# Altium PCB 330 下灯位.PcbDoc (part 1 of 5)
Units mm, origin at the board's own origin, x right, y up, seen from the top; angles counter-clockwise.
Board outline 301.8 x 92.3 mm, 2 copper layers (Top, Bottom), stack 0.323 mm thick; 298 components, 203 nets, 2190 pads, 758 vias.
Unrouted connection lines stored in the file: 36.
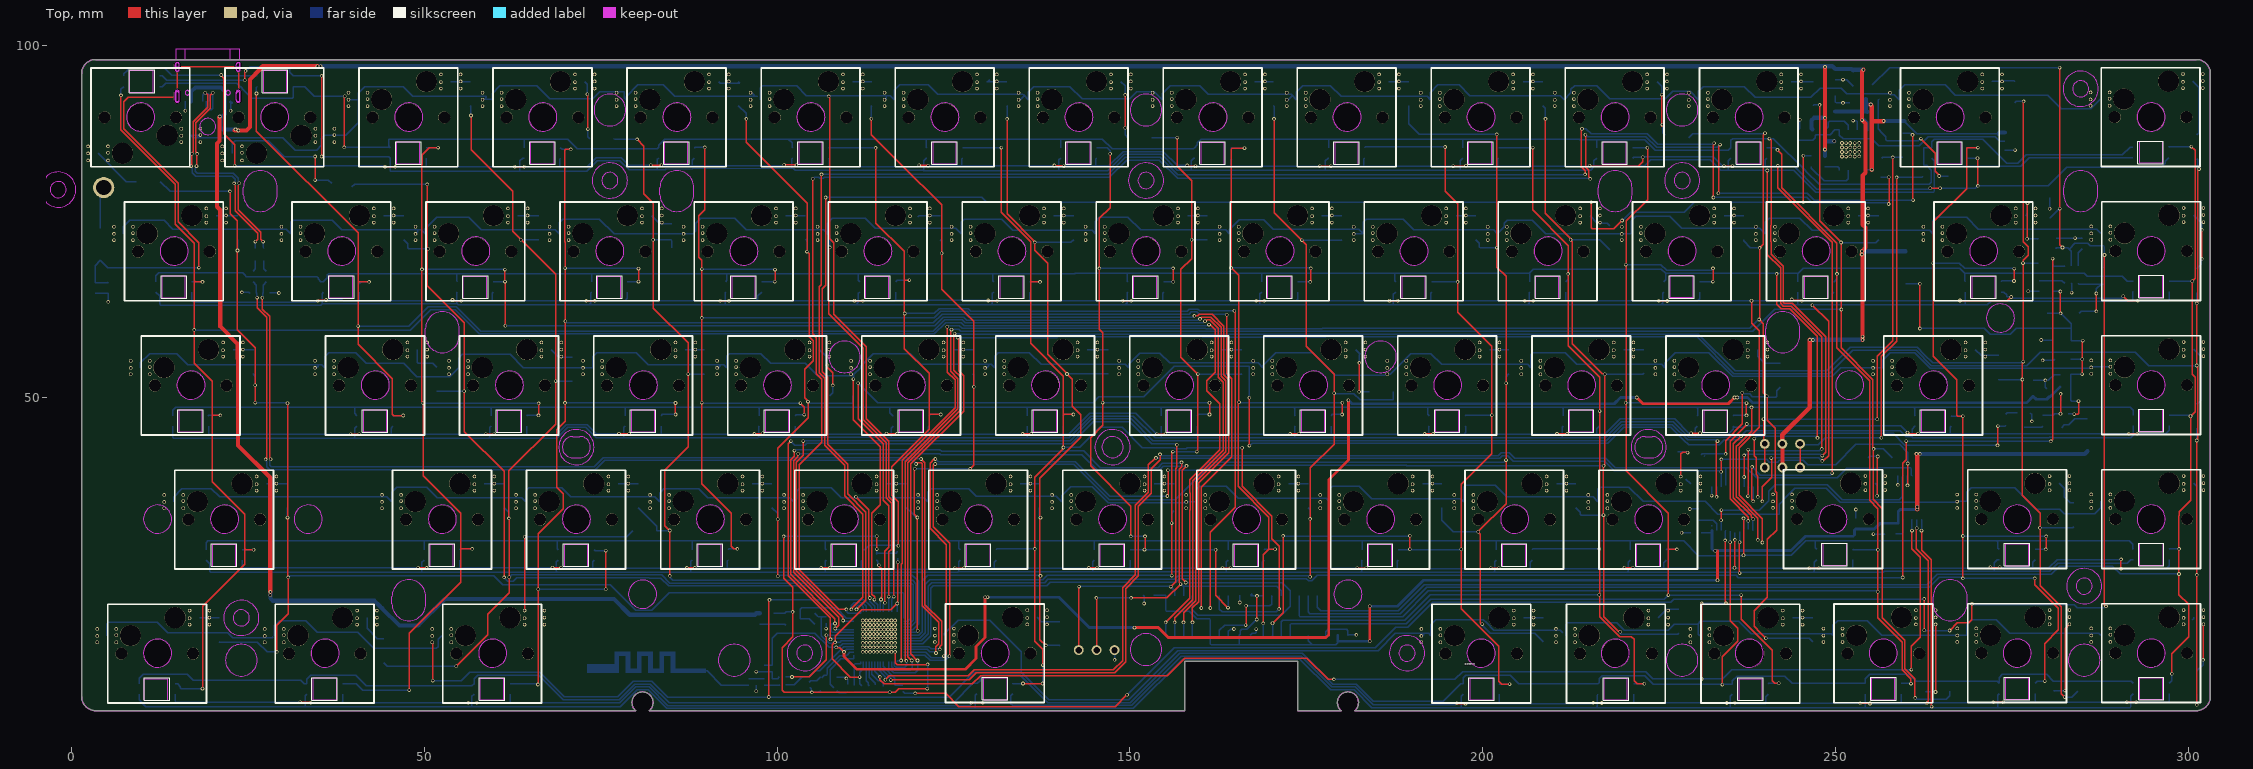
[diagram p0: Top view]
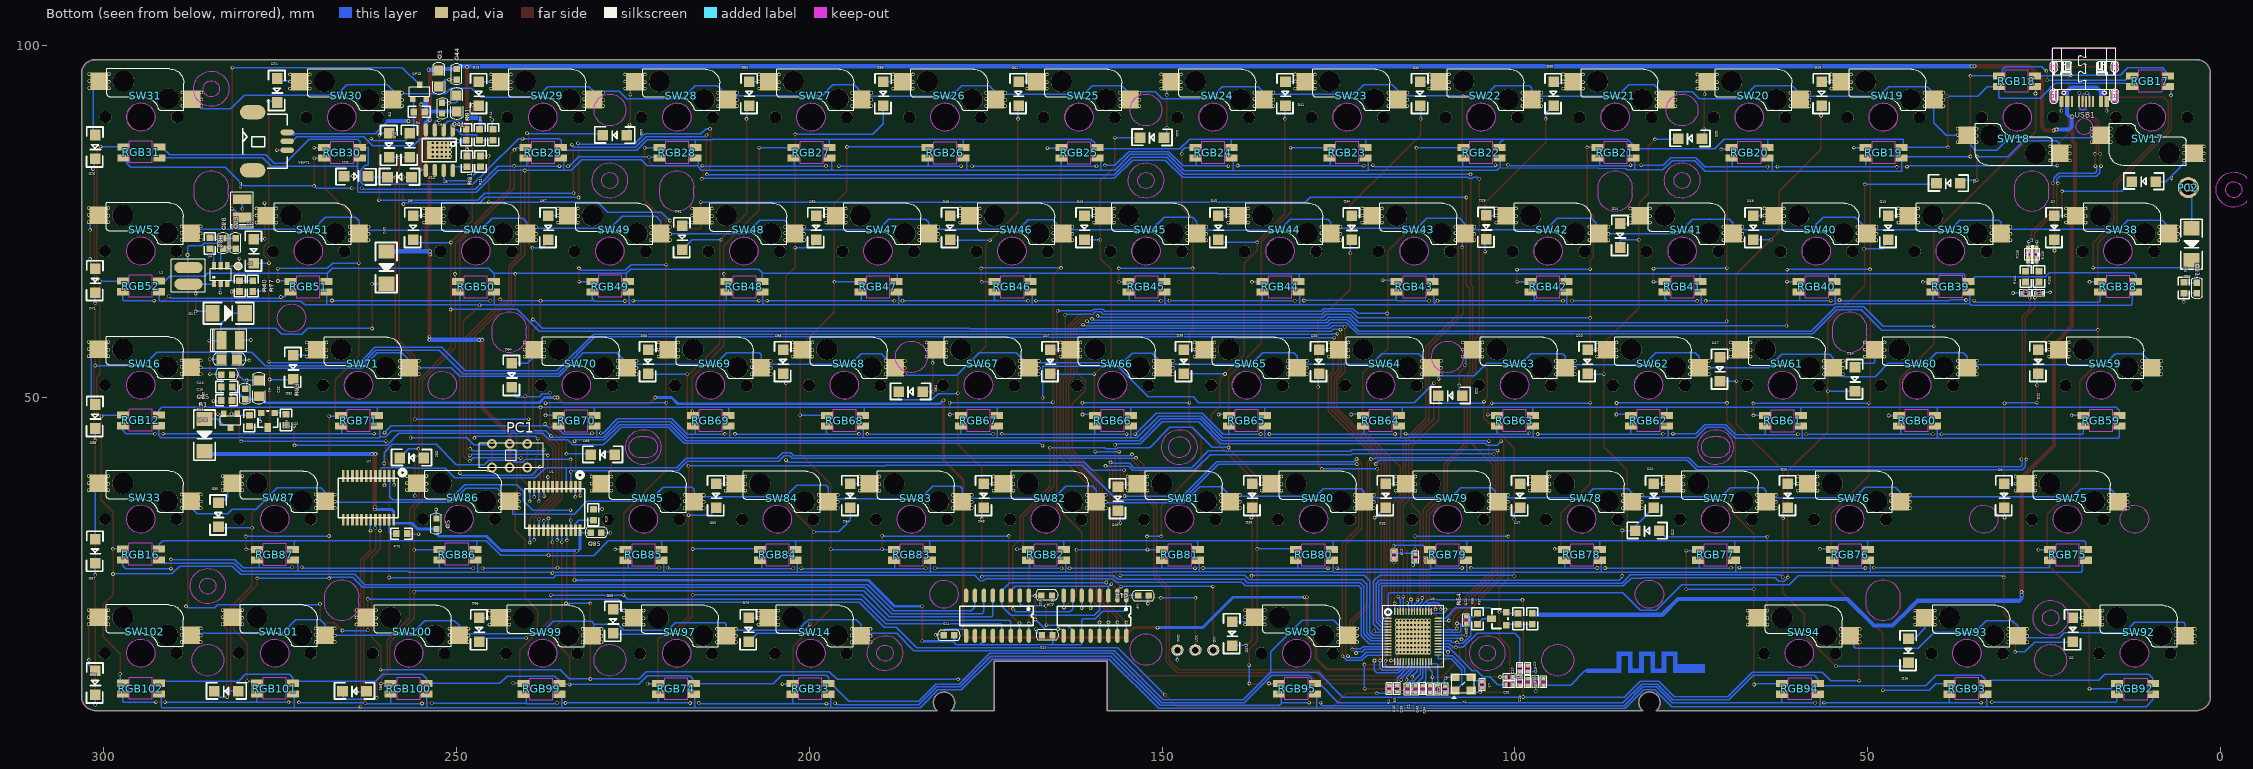
[diagram p1: Bottom view, seen from below]

## Layer stack, top to bottom
Solder Mask Top: solder mask 0.0102, Solder Resist, Dk 3.5
Top: signal copper 0.0343
Dielectric 1: dielectric 0.254, FR-4, Dk 4.3
Bottom: signal copper 0.0343
Solder Mask Bottom: solder mask 0.0102, Solder Resist, Dk 3.5

## Board outline
3.386,5.645 cw(c3.386,7.645) 1.386,7.645 1.386,95.945 cw(c3.386,95.945) 3.386,97.945 301.186,97.945 cw(c301.186,95.945) 303.186,95.945 303.186,7.645 cw(c301.186,7.645) 301.186,5.645 181.879,5.645 ccw(c180.916,6.795) 179.953,5.645 173.786,5.645 173.786,12.645 157.786,12.645 157.786,5.645 81.879,5.645 ccw(c80.916,6.795) 79.953,5.645

## Design rules (kind name [scope] priority, off if disabled: settings)
Clearance "Clearance - Default - DEFAULT - Net" [All] p1: gap=0.2 ignorepadtopadclearanceinfootprint=TRUE
ComponentClearance "ComponentClearance - Default - DEFAULT" [All] p1: gap=0.152 collisioncheckmode=3 verticalgap=0.254 showdistances=FALSE
DiffPairsRouting "DiffPairsRouting - DiffPair - Default" [All] p1: maxlimit=0.2 minlimit=0.2 mostfreqgap=0.2 toplayer_minwidth=0.2 toplayer_maxwidth=0.2 toplayer_prefwidth=0.2 bottomlayer_minwidth=0.2 bottomlayer_maxwidth=0.2 bottomlayer_prefwidth=0.2 maxuncoupledlength=12.7
FanoutControl Fanout_SOIC [IsSOIC] p1: bgadir=Out bgaviamode=Centered fanoutstyle=Auto fanoutdirection=Alternating viagrid=0.025 // Fanout_SOIC (Default Rule)
FanoutControl Fanout_Small [(CompPinCount < 5)] p2: bgadir=Out bgaviamode=Centered fanoutstyle=Auto fanoutdirection=OutThenIn viagrid=0.025 // Fanout_Small (Default Rule)
FanoutControl Fanout_BGA [IsBGA] p3: bgadir=Out bgaviamode=Centered fanoutstyle=Auto fanoutdirection=Alternating viagrid=0.025 // Fanout_BGA (Default Rule)
FanoutControl Fanout_LCC [IsLCC] p4: bgadir=Out bgaviamode=Centered fanoutstyle=Auto fanoutdirection=Alternating viagrid=0.025 // Fanout_LCC (Default Rule)
HoleToHoleClearance "HoleToHoleClearance - Default - DEFAULT" [All] p1: gap=0.152 allowstackedmicrovias=TRUE
Length "Default Length" [All] p1: maxlimit=1270 minlimit=0
MaxMinImpedance "Default Impedance" [All] p1: minimum=50.00 maximum=150.0
ParallelSegment "Default Parallel Segment Same Layer" [All] p1: limit=25.4 gap=5.08
ParallelSegment "Default Parallel Segment Adjasent" [All] p2: limit=25.4 gap=5.08
PolygonConnect [All] p1: connectstyle=Direct reliefconductorwidth=0.254 reliefentries=4 polygonreliefangle="90 Angle" airgapwidth=0.254
RoutingLayers "RoutingLayers - Default - DEFAULT" [All] p1: top layer_v5=TRUE bottom layer_v5=TRUE
RoutingPriority "RoutingPriority - Default - DEFAULT" [All] p1: routingpriority=3
RoutingTopology "Default Routing Topology" [All] p1: topology=Shortest
RoutingVias "RoutingVias - Default - DEFAULT" [All] p1: holewidth=0.305 width=0.508 viastyle="Through Hole" minholewidth=0.305 minwidth=0.508 maxholewidth=0.305 maxwidth=0.508
SMDToCorner "SMDToCorner - Default - DEFAULT" [All] p1: distance=0
SolderMaskExpansion [All] p1: expansion=0.102 istentingtop=FALSE
Width "Default Width" [All] p1: maxlimit=2 minlimit=0.15 preferedwidth=0.3
20 further rules are at their usual default settings.

## Classes and differential pairs
differential pair NewDifferentialPair1: +$$$12993 -$$$8367
differential pair $$$1963: +$$$19631 -$$$19635
differential pair USB_D: +USB_DN -USB_DP

## Components (designator, comment, footprint, x,y, rotation, side; value= is the part's Value field where it differs from the comment)
C1 "0402C" 0402C 109.903,8.677 r270 bottom
C2 "SC0402" SC0402 113.054,8.711 r90 bottom
C3 "0805CA" 0805CA 252.549,96.386 r270 bottom
C4 "0603C" 0603C 279.98,50.539 r270 bottom
C5 "0603C" 0603C 252.857,32.131 r270 bottom
C6 "0603C" 0603C 252.081,91.044 r90 bottom
C7 "0402C" 0402C 104.614,9.329 r90 bottom
C11 "0603C" 0603C 180.213,16.32 r180 bottom
C13 "SC0402" SC0402 99.304,11.611 r90 bottom
C14 "0603C" 0603C 152.654,21.971 r180 bottom
C15 "0805CA" 0805CA 283.364,55.447 r180 bottom
C16 "0603C" 0603C 166.37,21.971 r0 bottom
C17 "0603C" 0603C 166.28,16.32 r0 bottom
C18 "0402C" 0402C 95.947,9.702 r90 bottom
C19 "SC0402" SC0402 117.094,27.686 r270 bottom
C20 "0402C" 0402C 99.303,9.723 r270 bottom
C21 "0603C" 0603C 3.321,65.555 r90 bottom
C23 "0603C" 0603C 281.305,71.882 r270 bottom
C25 "0603C" 0603C 282.607,53.278 r0 bottom
C26 "0402C" 0402C 98.166,9.711 r270 bottom
C27 "0402C" 0402C 97.061,9.705 r90 bottom
C28 "0603C" 0603C 283.083,71.882 r270 bottom
C31 "0402C" 0402C 100.782,9.329 r0 bottom
C32 "0805CA" 0805CA 278.048,50.218 r90 bottom
C33 "SC0402" SC0402 114.081,8.705 r90 bottom
C34 "SC0402" SC0402 110.99,8.705 r90 bottom
C35 "0603C" 0603C 230.239,30.861 r0 bottom
C36 "SC0402" SC0402 100.78,10.414 r0 bottom
C37 "SC0402" SC0402 114.081,27.389 r270 bottom
C38 "SC0402" SC0402 106.934,18.484 r90 bottom
C40 "SC0402" SC0402 115.206,8.708 r90 bottom
C41 "0805CA" 0805CA 249.989,90.589 r90 bottom
C43 "SC0402" SC0402 112.019,8.705 r90 bottom
C44 "0603C" 0603C 249.986,95.84 r270 bottom
CA2 "CAP-TAN-B-3528" CAP-TAN-B-3528 280.416,76.835 r90 bottom
CA3 "CAP-TAN-B-3528" CAP-TAN-B-3528 282.063,58.14 r180 bottom
D1 "IN1418SMD" IN1418SMD 36.73,80.391 r0 bottom
D2 "IN1418SMD" IN1418SMD 20.884,18.915 r270 bottom
D3 "IN1418SMD" IN1418SMD 30.621,37.915 r270 bottom
D5 "IN1418SMD" IN1418SMD 9.044,80.645 r0 bottom
D6 "IN1418SMD" IN1418SMD 256.171,75.914 r270 bottom
D7 "IN1418SMD" IN1418SMD 23.504,75.91 r270 bottom
D9 "IN1418SMD" IN1418SMD 259.588,87.574 r270 bottom
D10 "IN1418SMD" IN1418SMD 256.313,81.28 r0 bottom
D11 "IN1418SMD" IN1418SMD 266.079,81.396 r180 bottom
D12 "IN1418SMD" IN1418SMD 25.793,56.915 r270 bottom
D13 "IN1418SMD" IN1418SMD 47.061,75.917 r270 bottom
D14 "IN1418SMD" IN1418SMD 51.778,54.4 r270 bottom
D15 "IN1418SMD" IN1418SMD 61.292,37.916 r270 bottom
D16 "IN1418SMD" IN1418SMD 44.196,15.946 r270 bottom
D17 "IN1418SMD" IN1418SMD 70.918,55.865 r270 bottom
D18 "IN1418SMD" IN1418SMD 66.182,75.916 r270 bottom
D19 "IN1418SMD" IN1418SMD 56.493,94.914 r270 bottom
D21 "IN1418SMD" IN1418SMD 80.287,37.913 r270 bottom
D22 "IN1418SMD" IN1418SMD 79.431,31.115 r0 bottom
D23 "IN1418SMD" IN1418SMD 89.692,56.917 r270 bottom
D24 "IN1418SMD" IN1418SMD 85.068,74.796 r270 bottom
D25 "IN1418SMD" IN1418SMD 73.363,86.725 r0 bottom
D27 "IN1418SMD" IN1418SMD 99.256,37.912 r270 bottom
D28 "IN1418SMD" IN1418SMD 107.342,50.292 r0 bottom
D29 "IN1418SMD" IN1418SMD 104.031,75.965 r270 bottom
D30 "IN1418SMD" IN1418SMD 94.513,94.914 r270 bottom
D32 "IN1418SMD" IN1418SMD 118.299,37.918 r270 bottom
D33 "IN1418SMD" IN1418SMD 127.755,56.917 r270 bottom
D34 "IN1418SMD" IN1418SMD 123.118,75.896 r270 bottom
D35 "IN1418SMD" IN1418SMD 113.434,94.917 r270 bottom
D37 "IN1418SMD" IN1418SMD 140.081,18.359 r270 bottom
D38 "IN1418SMD" IN1418SMD 137.219,37.916 r270 bottom
D39 "IN1418SMD" IN1418SMD 146.916,56.912 r270 bottom
D40 "IN1418SMD" IN1418SMD 142.017,75.917 r270 bottom
D41 "IN1418SMD" IN1418SMD 132.514,94.912 r270 bottom
D43 "IN1418SMD" IN1418SMD 160.999,75.914 r270 bottom
D44 "IN1418SMD" IN1418SMD 149.633,86.868 r0 bottom
D46 "IN1418SMD" IN1418SMD 156.254,37.501 r270 bottom
D47 "IN1418SMD" IN1418SMD 165.836,56.915 r270 bottom
D48 "IN1418SMD" IN1418SMD 180.057,75.916 r270 bottom
D49 "IN1418SMD" IN1418SMD 175.272,37.915 r270 bottom
D50 "IN1418SMD" IN1418SMD 183.858,50.841 r0 bottom
D51 "IN1418SMD" IN1418SMD 170.353,94.916 r270 bottom
D53 "IN1418SMD" IN1418SMD 199.033,75.913 r270 bottom
D54 "IN1418SMD" IN1418SMD 194.206,37.915 r270 bottom
D55 "IN1418SMD" IN1418SMD 203.734,56.917 r270 bottom
D56 "IN1418SMD" IN1418SMD 189.51,94.915 r270 bottom
D58 "IN1418SMD" IN1418SMD 222.869,56.91 r270 bottom
D59 "IN1418SMD" IN1418SMD 227.819,20.112 r270 bottom
D60 "IN1418SMD" IN1418SMD 213.231,37.91 r270 bottom
D61 "IN1418SMD" IN1418SMD 218.027,74.501 r270 bottom
D62 "IN1418SMD" IN1418SMD 208.511,94.916 r270 bottom
D64 "IN1418SMD" IN1418SMD 242.194,54.965 r270 bottom
D65 "IN1418SMD" IN1418SMD 246.815,18.913 r270 bottom
D66 "IN1418SMD" IN1418SMD 227.513,41.91 r0 bottom
D67 "IN1418SMD" IN1418SMD 237.002,75.915 r270 bottom
D68 "IN1418SMD" IN1418SMD 225.789,87.195 r0 bottom
D70 "IN1418SMD" IN1418SMD 278.765,72.588 r270 bottom
D71 "IN1418SMD" IN1418SMD 301.244,68.397 r270 bottom
D72 "IN1418SMD" IN1418SMD 256.667,87.603 r270 bottom
D73 "IN1418SMD" IN1418SMD 246.85,94.915 r270 bottom
D74 "IN1418SMD" IN1418SMD 275.463,95.35 r270 bottom
D75 "IN1418SMD" IN1418SMD 301.244,87.349 r270 bottom
D76 "IN1418SMD" IN1418SMD 208.606,18.916 r270 bottom
D81 "IN1418SMD" IN1418SMD 262.692,8.382 r0 bottom
D82 "IN1418SMD" IN1418SMD 254.593,41.461 r0 bottom
D83 "IN1418SMD" IN1418SMD 273.177,56.107 r270 bottom
D84 "IN1418SMD" IN1418SMD 280.853,8.382 r0 bottom
D85 "IN1418SMD" IN1418SMD 283.77,35.189 r270 bottom
D86 "IN1418SMD" IN1418SMD 301.244,11.374 r270 bottom
D87 "IN1418SMD" IN1418SMD 301.244,30.043 r270 bottom
D88 "IN1418SMD" IN1418SMD 301.244,49.141 r270 bottom
DD5 "DIODE_SMA" DIODE_SMA 4.064,74.041 r270 bottom
DIN "TSET1.0GA" TSET1.0GA 142.748,14.224 r180 bottom
DV1 "DIODE_SMA" DIODE_SMA 284.607,61.976 r180 bottom
DV2 "DIODE_SMA" DIODE_SMA 259.969,70.739 r270 bottom
DV3 "DIODE_SMA" DIODE_SMA 285.75,46.99 r270 bottom
GND "TSET1.0GA" TSET1.0GA 147.828,14.224 r180 bottom
ICE "TSET1.0" TSET1.0 280.977,68.661 r180 bottom
L1 "CD32" CD32 288.031,68.461 r270 bottom
L2 "2012" 2012 26.647,70.309 r270 bottom
LCK "TSET1.0GA" TSET1.0GA 145.288,14.224 r180 bottom
P02 "TSET1.0CA" TSET1.0CA 4.536,79.795 r180 bottom
PC1 "Comment" 编码器 239.975,40.151 r0 bottom
Q23 "SOT-23" SOT-23 276.769,46.846 r0 bottom
Q24 "SOT-23" SOT-23 102.235,18.669 r90 bottom
QP18 "SOT23" SOT23 255.257,93.343 r180 bottom
QP20 "SOT23" SOT23 282.067,46.736 r0 bottom
R1 "0603R" 0603R 282.607,51.525 r0 bottom
R2 "R0402" R0402 117.8,8.768 r90 bottom
R3 "R0402" R0402 116.713,8.763 r90 bottom
R4 "0603R" 0603R 255.302,90.53 r180 bottom
R5 "0603R" 0603R 5.169,65.576 r90 bottom
R9 "0603R" 0603R 246.75,87.277 r270 bottom
R10 "0603R" 0603R 230.632,33.401 r90 bottom
R11 "0603R" 0603R 244.827,87.277 r90 bottom
R14 "0603R" 0603R 282.624,49.63 r180 bottom
R21 "0603R" 0603R 246.618,83.498 r90 bottom
R31 "0603R" 0603R 248.532,83.498 r270 bottom
R33 "0603R" 0603R 274.193,46.863 r90 bottom
R40 "0603R" 0603R 280.763,65.833 r90 bottom
R54 "0603R" 0603R 105.294,18.669 r90 bottom
R56 "0603R" 0603R 99.531,18.669 r270 bottom
R70 "0603R" 0603R 257.81,30.734 r180 bottom
R77 "0603R" 0603R 278.916,65.833 r270 bottom
R80 "0603R" 0603R 284.988,71.882 r90 bottom
R87 "0603R" 0603R 97.536,18.669 r90 bottom
R91 "0603R" 0603R 248.643,87.277 r270 bottom
R100 "0603R" 0603R 25.7,67.179 r270 bottom
R101 "0603R" 0603R 27.588,67.179 r270 bottom
R103 "0603R" 0603R 279.4,46.736 r270 bottom
R115 "R0402" R0402 26.051,70.304 r90 bottom
R116 "R0402" R0402 27.247,70.304 r90 bottom
RGB12 "LED-3528-4" LED-3528-4 294.786,46.775 r0 top
RGB16 "LED-3528-4" LED-3528-4 294.786,27.775 r0 top
RGB17 "LED-3528-4" LED-3528-4 9.953,94.864 r180 top
RGB18 "LED-3528-4" LED-3528-4 28.829,94.869 r180 top
RGB19 "LED-3528-4" LED-3528-4 47.732,84.714 r0 top
RGB20 "LED-3528-4" LED-3528-4 66.732,84.714 r0 top
RGB21 "LED-3528-4" LED-3528-4 85.732,84.714 r0 top
RGB22 "LED-3528-4" LED-3528-4 104.732,84.714 r0 top
RGB23 "LED-3528-4" LED-3528-4 123.732,84.714 r0 top
RGB24 "LED-3528-4" LED-3528-4 142.732,84.714 r0 top
RGB25 "LED-3528-4" LED-3528-4 161.732,84.714 r0 top
RGB26 "LED-3528-4" LED-3528-4 180.732,84.714 r0 top
RGB27 "LED-3528-4" LED-3528-4 199.732,84.714 r0 top
RGB28 "LED-3528-4" LED-3528-4 218.732,84.714 r0 top
RGB29 "LED-3528-4" LED-3528-4 237.732,84.714 r0 top
RGB30 "LED-3528-4" LED-3528-4 266.232,84.714 r0 top
RGB31 "LED-3528-4" LED-3528-4 294.692,84.764 r0 top
RGB33 "LED-3528-4" LED-3528-4 199.82,8.714 r0 top
RGB38 "LED-3528-4" LED-3528-4 14.482,65.714 r0 top
RGB39 "LED-3528-4" LED-3528-4 38.232,65.714 r0 top
RGB40 "LED-3528-4" LED-3528-4 57.232,65.714 r0 top
RGB41 "LED-3528-4" LED-3528-4 76.232,65.714 r0 top
RGB42 "LED-3528-4" LED-3528-4 95.232,65.714 r0 top
RGB43 "LED-3528-4" LED-3528-4 114.232,65.714 r0 top
RGB44 "LED-3528-4" LED-3528-4 133.232,65.714 r0 top
RGB45 "LED-3528-4" LED-3528-4 152.232,65.714 r0 top
RGB46 "LED-3528-4" LED-3528-4 171.232,65.714 r0 top
RGB47 "LED-3528-4" LED-3528-4 190.232,65.714 r0 top
RGB48 "LED-3528-4" LED-3528-4 209.232,65.714 r0 top
RGB49 "LED-3528-4" LED-3528-4 228.232,65.714 r0 top
RGB50 "LED-3528-4" LED-3528-4 247.232,65.714 r0 top
RGB51 "LED-3528-4" LED-3528-4 270.982,65.714 r0 top
RGB52 "LED-3528-4" LED-3528-4 294.786,65.775 r0 top
RGB59 "LED-3528-4" LED-3528-4 16.862,46.714 r0 top
RGB60 "LED-3528-4" LED-3528-4 42.987,46.714 r0 top
RGB61 "LED-3528-4" LED-3528-4 61.987,46.714 r0 top
RGB62 "LED-3528-4" LED-3528-4 80.987,46.714 r0 top
RGB63 "LED-3528-4" LED-3528-4 99.987,46.714 r0 top
RGB64 "LED-3528-4" LED-3528-4 118.987,46.714 r0 top
RGB65 "LED-3528-4" LED-3528-4 137.987,46.714 r0 top
RGB66 "LED-3528-4" LED-3528-4 156.987,46.714 r0 top
RGB67 "LED-3528-4" LED-3528-4 175.987,46.714 r0 top
RGB68 "LED-3528-4" LED-3528-4 194.987,46.714 r0 top
RGB69 "LED-3528-4" LED-3528-4 213.987,46.714 r0 top
RGB70 "LED-3528-4" LED-3528-4 232.987,46.714 r0 top
RGB71 "LED-3528-4" LED-3528-4 263.862,46.714 r0 top
RGB74 "LED-3528-4" LED-3528-4 218.907,8.714 r0 top
RGB75 "LED-3528-4" LED-3528-4 21.612,27.714 r0 top
RGB76 "LED-3528-4" LED-3528-4 52.487,27.714 r0 top
RGB77 "LED-3528-4" LED-3528-4 71.487,27.714 r0 top
RGB78 "LED-3528-4" LED-3528-4 90.487,27.714 r0 top
RGB79 "LED-3528-4" LED-3528-4 109.487,27.714 r0 top
RGB80 "LED-3528-4" LED-3528-4 128.487,27.714 r0 top
RGB81 "LED-3528-4" LED-3528-4 147.487,27.714 r0 top
RGB82 "LED-3528-4" LED-3528-4 166.487,27.714 r0 top
RGB83 "LED-3528-4" LED-3528-4 185.487,27.714 r0 top
RGB84 "LED-3528-4" LED-3528-4 204.487,27.714 r0 top
RGB85 "LED-3528-4" LED-3528-4 223.487,27.714 r0 top
RGB86 "LED-3528-4" LED-3528-4 249.902,27.764 r0 top
RGB87 "LED-3528-4" LED-3528-4 275.775,27.759 r0 top
RGB92 "LED-3528-4" LED-3528-4 12.112,8.714 r0 top
RGB93 "LED-3528-4" LED-3528-4 35.857,8.714 r0 top
RGB94 "LED-3528-4" LED-3528-4 59.602,8.714 r0 top
RGB95 "LED-3528-4" LED-3528-4 130.857,8.756 r0 top
RGB99 "LED-3528-4" LED-3528-4 237.957,8.714 r0 top
RGB100 "LED-3528-4" LED-3528-4 256.823,8.748 r0 top
RGB101 "LED-3528-4" LED-3528-4 275.775,8.775 r0 top
RGB102 "LED-3528-4" LED-3528-4 294.786,8.775 r0 top
SW14 "SPEC-KS-001" SPEC-KS-001 199.82,13.734 r180 top
SW16 "SPEC-KS-001" SPEC-KS-001 294.786,51.795 r180 top
SW17 "SPEC-KS-001" SPEC-KS-001 9.732,89.734 r0 top
SW18 "SPEC-KS-001" SPEC-KS-001 28.732,89.734 r0 top
SW19 "SPEC-KS-001" SPEC-KS-001 47.732,89.734 r180 top
SW20 "SPEC-KS-001" SPEC-KS-001 66.732,89.734 r180 top
SW21 "SPEC-KS-001" SPEC-KS-001 85.732,89.734 r180 top
SW22 "SPEC-KS-001" SPEC-KS-001 104.732,89.734 r180 top
SW23 "SPEC-KS-001" SPEC-KS-001 123.732,89.734 r180 top
SW24 "SPEC-KS-001" SPEC-KS-001 142.732,89.734 r180 top
SW25 "SPEC-KS-001" SPEC-KS-001 161.732,89.734 r180 top
SW26 "SPEC-KS-001" SPEC-KS-001 180.732,89.734 r180 top
SW27 "SPEC-KS-001" SPEC-KS-001 199.732,89.734 r180 top
SW28 "SPEC-KS-001" SPEC-KS-001 218.732,89.734 r180 top
SW29 "SPEC-KS-001" SPEC-KS-001 237.732,89.734 r180 top
SW30 "SPEC-KS-001" SPEC-KS-001 266.232,89.734 r180 top
SW31 "SPEC-KS-001" SPEC-KS-001 294.692,89.784 r180 top
SW33 "SPEC-KS-001" SPEC-KS-001 294.786,32.795 r180 top
SW38 "SPEC-KS-001" SPEC-KS-001 14.482,70.734 r180 top
SW39 "SPEC-KS-001" SPEC-KS-001 38.232,70.734 r180 top
SW40 "SPEC-KS-001" SPEC-KS-001 57.232,70.734 r180 top
SW41 "SPEC-KS-001" SPEC-KS-001 76.232,70.734 r180 top
SW42 "SPEC-KS-001" SPEC-KS-001 95.232,70.734 r180 top
SW43 "SPEC-KS-001" SPEC-KS-001 114.232,70.734 r180 top
SW44 "SPEC-KS-001" SPEC-KS-001 133.232,70.734 r180 top
SW45 "SPEC-KS-001" SPEC-KS-001 152.232,70.734 r180 top
SW46 "SPEC-KS-001" SPEC-KS-001 171.232,70.734 r180 top
SW47 "SPEC-KS-001" SPEC-KS-001 190.232,70.734 r180 top
SW48 "SPEC-KS-001" SPEC-KS-001 209.232,70.734 r180 top
SW49 "SPEC-KS-001" SPEC-KS-001 228.232,70.734 r180 top
SW50 "SPEC-KS-001" SPEC-KS-001 247.232,70.734 r180 top
SW51 "SPEC-KS-001" SPEC-KS-001 270.982,70.734 r180 top
SW52 "SPEC-KS-001" SPEC-KS-001 294.786,70.795 r180 top
SW59 "SPEC-KS-001" SPEC-KS-001 16.862,51.734 r180 top
SW60 "SPEC-KS-001" SPEC-KS-001 42.987,51.734 r180 top
SW61 "SPEC-KS-001" SPEC-KS-001 61.987,51.734 r180 top
SW62 "SPEC-KS-001" SPEC-KS-001 80.987,51.734 r180 top
SW63 "SPEC-KS-001" SPEC-KS-001 99.987,51.734 r180 top
SW64 "SPEC-KS-001" SPEC-KS-001 118.987,51.734 r180 top
SW65 "SPEC-KS-001" SPEC-KS-001 137.987,51.734 r180 top
SW66 "SPEC-KS-001" SPEC-KS-001 156.987,51.734 r180 top
SW67 "SPEC-KS-001" SPEC-KS-001 175.987,51.734 r180 top
SW68 "SPEC-KS-001" SPEC-KS-001 194.987,51.734 r180 top
SW69 "SPEC-KS-001" SPEC-KS-001 213.987,51.734 r180 top
SW70 "SPEC-KS-001" SPEC-KS-001 232.987,51.734 r180 top
SW71 "SPEC-KS-001" SPEC-KS-001 263.862,51.734 r180 top
SW75 "SPEC-KS-001" SPEC-KS-001 21.612,32.734 r180 top
SW76 "SPEC-KS-001" SPEC-KS-001 52.487,32.734 r180 top
SW77 "SPEC-KS-001" SPEC-KS-001 71.487,32.734 r180 top
SW78 "SPEC-KS-001" SPEC-KS-001 90.487,32.734 r180 top
SW79 "SPEC-KS-001" SPEC-KS-001 109.487,32.734 r180 top
SW80 "SPEC-KS-001" SPEC-KS-001 128.487,32.734 r180 top
SW81 "SPEC-KS-001" SPEC-KS-001 147.487,32.734 r180 top
SW82 "SPEC-KS-001" SPEC-KS-001 166.487,32.734 r180 top
SW83 "SPEC-KS-001" SPEC-KS-001 185.487,32.734 r180 top
SW84 "SPEC-KS-001" SPEC-KS-001 204.487,32.734 r180 top
SW85 "SPEC-KS-001" SPEC-KS-001 223.487,32.734 r180 top
SW86 "SPEC-KS-001" SPEC-KS-001 249.671,32.795 r180 top
SW87 "SPEC-KS-001" SPEC-KS-001 275.775,32.779 r180 top
SW92 "SPEC-KS-001" SPEC-KS-001 12.112,13.734 r180 top
SW93 "SPEC-KS-001" SPEC-KS-001 35.857,13.734 r180 top
SW94 "SPEC-KS-001" SPEC-KS-001 59.602,13.734 r180 top
SW95 "SPEC-KS-001" SPEC-KS-001 130.857,13.776 r180 top
SW97 "SPEC-KS-001" SPEC-KS-001 218.907,13.734 r180 top
SW99 "SPEC-KS-001" SPEC-KS-001 237.957,13.734 r180 top
SW100 "SPEC-KS-001" SPEC-KS-001 256.823,13.768 r180 top
SW101 "SPEC-KS-001" SPEC-KS-001 275.786,13.795 r180 top
SW102 "SPEC-KS-001" SPEC-KS-001 294.786,13.795 r180 top
U1 "7153-SSOP24A" 7153-SSOP24A 236.093,34.29 r270 bottom
U4 "SOT23-6" SOT23-6 283.464,66.207 r180 bottom
U5 "SOP-8" SOP-8 252.476,85.09 r0 bottom
U7 "7153-SSOP24" 7153-SSOP24 262.509,35.814 r270 bottom
U8 "QFN56.4" QFN56.4 114.427,16.129 r180 bottom
U9 "SOP16" SOP16 156.972,19.106 r270 bottom
U12 "SOP16" SOP16 170.815,19.106 r270 bottom
USB1 "USB-TYPEC" "USB TYPC-C/F 16PIN" 19.289,92.184 r180 top
VBAT1 "FSZXXIHP_3PIN" FSZXXIHP_3PIN 276.479,86.36 r270 bottom
Y4 "XTAL-3225" XTAL-3225 107.325,9.432 r180 bottom
Z1 "0402C" 0402C 27.588,64.852 r180 bottom
Z2 "0402C" 0402C 25.7,64.852 r0 bottom
Z3 "0402C" 0402C 98.171,11.611 r90 bottom

## Footprints (in the part's own frame and the unit in brackets; to place one, negate y for a bottom-side part, rotate by r counter-clockwise, add the part's x,y. Pads: shape width x height; smd on the part's side, far side on the other; paste and mask are expansions set on the pad)
0402C [mm]
  rect 0.5x0.6 smd mask+0.05: 1(-0.45,0) 2(0.45,0)
  Top keep-out region: -0.2,0.45 0.2,0.45 0.2,-0.45 -0.2,-0.45 -0.2,0.45
  silkscreen extent -0.85,-0.45 0.85,0.45
0603C [mm]
  rrect0% 0.9x0.9 smd mask+0.05: 1(-0.75,0) 2(0.75,0)
  silkscreen extent -1.56,-0.8 1.5,0.7
0603R [mm]
  rect 0.93x0.98 smd: 1(-0.77,0) 2(0.77,0)
  silkscreen extent -1.53,-0.79 1.54,0.79
0805CA [mm]
  rect 1.4x1.4 smd: 1(0,0) 2(2.24,0)
  silkscreen extent -1.16,-0.85 3.4,0.85
2012 [mm]
  rect 0.8x0.6 smd mask+0.05: 1(-0.9,-0.6) 2(0.9,-0.6) 3(0.9,0.6) 4(-0.9,0.6)
  silkscreen extent -1.17,-0.7 1.18,0.81
7153-SSOP24 [mm]
  rect 1.65x0.4 smd: 1(-3.1,3.575) 2(-3.1,2.925) 3(-3.1,2.275) 4(-3.1,1.625) 5(-3.1,0.975) 6(-3.1,0.325) 7(-3.1,-0.325) 8(-3.1,-0.975) 9(-3.1,-1.625) 10(-3.1,-2.275) 11(-3.1,-2.925) 12(-3.1,-3.575) 13(3.1,-3.575) 14(3.1,-2.925) 15(3.1,-2.275) 16(3.1,-1.625) 17(3.1,-0.975) 18(3.1,-0.325) 19(3.1,0.325) 20(3.1,0.975) 21(3.1,1.625) 22(3.1,2.275) 23(3.1,2.925) 24(3.1,3.575)
  silkscreen extent -4.01,-4.25 2.8,5.27
7153-SSOP24A [mm]
  rect 1.65x0.4 smd: 1(-3.1,3.575) 2(-3.1,2.925) 3(-3.1,2.275) 4(-3.1,1.625) 5(-3.1,0.975) 6(-3.1,0.325) 7(-3.1,-0.325) 8(-3.1,-0.975) 9(-3.1,-1.625) 10(-3.1,-2.275) 11(-3.1,-2.925) 12(-3.1,-3.575) 13(3.1,-3.575) 14(3.1,-2.925) 15(3.1,-2.275) 16(3.1,-1.625) 17(3.1,-0.975) 18(3.1,-0.325) 19(3.1,0.325) 20(3.1,0.975) 21(3.1,1.625) 22(3.1,2.275) 23(3.1,2.925) 24(3.1,3.575)
  silkscreen extent -5.2,-4.25 2.8,4.25
CAP-TAN-B-3528 [mm]
  rect 1.4x2.6 smd mask+0.05: 1(-1.3,0) 2(1.3,0)
  silkscreen extent -2.8,-1.6 2.3,1.6
CD32 [mm]
  oval 1.6x4 smd: 1(0.008,-0.005) 2(2.358,-0.005)
  silkscreen extent -1.16,-2.41 3.53,2.39
DIODE_SMA [mil]
  rect 80x90 smd: 1(0,0) 2(180,0)
  silkscreen extent -50,-60 230,60
FSZXXIHP_3PIN [mm]
  oval 2x3.6 smd: 0(4.114,-2.446) 0/2(-4.114,-2.446)
  oval 0.8x1.9 smd: 1(-1.249,2.446) 2(0.002,2.446) 3(1.259,2.446)
  silkscreen extent -3.85,-3.85 3.85,2.45
IN1418SMD [mm]
  rrect0% 1.5x1.5 smd: 1(0.1,0) 2(3.5,0)
  silkscreen extent -1.02,-1.22 4.63,1.11
LED-3528-4 [mm]
  rect 1.7x1 smd far side: 1(-2.55,-0.75) 2(-2.55,0.75) 3(2.55,-0.75) 4(2.55,0.75)
  silkscreen extent -1.8,-1.6 1.8,1.6
QFN56.4 [mm]
  oval 1x0.2 smd: 1(-3.55,2.6) 2(-3.55,2.2) 3(-3.55,1.8) 4(-3.55,1.4) 5(-3.55,1) 6(-3.55,0.6) 7(-3.55,0.2) 8(-3.55,-0.2) 9(-3.55,-0.6) 10(-3.55,-1) 11(-3.55,-1.4) 12(-3.55,-1.8) 13(-3.55,-2.2) 14(-3.55,-2.6) 29(3.55,-2.6) 30(3.55,-2.2) 31(3.55,-1.8) 32(3.55,-1.4) 33(3.55,-1) 34(3.55,-0.6) 35(3.55,-0.2) 36(3.55,0.2) 37(3.55,0.6) 38(3.55,1) 39(3.55,1.4) 40(3.55,1.8) 41(3.55,2.2) 42(3.55,2.6)
  oval 0.2x1 smd: 15(-2.6,-3.55) 16(-2.2,-3.55) 17(-1.8,-3.55) 18(-1.4,-3.55) 19(-1,-3.55) 20(-0.6,-3.55) 21(-0.2,-3.55) 22(0.2,-3.55) 23(0.6,-3.55) 24(1,-3.55) 25(1.4,-3.55) 26(1.8,-3.55) 27(2.2,-3.55) 28(2.6,-3.55) 43(2.6,3.55) 44(2.2,3.55) 45(1.8,3.55) 46(1.4,3.55) 47(1,3.55) 48(0.6,3.55) 49(0.2,3.55) 50(-0.2,3.55) 51(-0.6,3.55) 52(-1,3.55) 53(-1.4,3.55) 54(-1.8,3.55) 55(-2.2,3.55) 56(-2.6,3.55)
  rect 5x5 smd: 57(0,0)
  silkscreen extent -4.32,-4.33 4.32,4.39
R0402 [mm]
  rect 0.5x0.6 smd mask+0.05: 1(-0.45,0) 2(0.45,0)
  Top keep-out region: -0.2,0.45 0.2,0.45 0.2,-0.45 -0.2,-0.45 -0.2,0.45
  silkscreen extent -0.85,-0.45 0.85,0.45
SC0402 [mm]
  rect 0.5x0.6 smd mask+0.05: 1(-0.45,0) 2(0.45,0)
  Top keep-out region: -0.2,0.45 0.2,0.45 0.2,-0.45 -0.2,-0.45 -0.2,0.45
  silkscreen extent -0.85,-0.45 0.85,0.45
SOP16 [mm]
  oval 2x0.635 smd: 1(-2.85,1.905) 2(-2.85,0.635) 3(-2.85,-0.635) 4(-2.85,-1.905) 5(-2.85,-3.175) 6(-2.85,-4.445) 7(-2.85,-5.715) 8(-2.85,-6.985) 9(2.85,-6.985) 10(2.85,-5.715) 11(2.85,-4.445) 12(2.85,-3.175) 13(2.85,-1.905) 14(2.85,-0.635) 15(2.85,0.635) 16(2.85,1.905)
  silkscreen extent -1.35,-7.89 1.38,2.54
SOP-8 [mil]
  oval 24x74 smd: 1(-75,-113) 2(-25,-113) 3(25,-113) 4(75,-113) 5(75,113) 6(25,113) 7(-25,113) 8(-75,113)
  rect 133.86x98.43 smd: 9(0.15,-0.74)
  silkscreen extent -95,-65 95,65
SOT23 [mm]
  rect 0.8x0.9 smd mask+0.05: 1(-0.95,-1) 2(0.95,-1) 3(0,1)
  silkscreen extent -1.45,-0.65 1.45,0.65
SOT23-6 [mm]
  rect 0.6x1 smd: 1(-0.95,0) 2(0,0) 3(0.95,0) 4(0.95,2.5) 5(0,2.5) 6(-0.95,2.5)
  silkscreen extent -1.5,0.4 1.5,2.09
SOT-23 [mil]
  rect 36x36 smd: 1(-37.5,-39) 2(37.5,-39)
  rect 36x50 smd: 3(0,41)
  silkscreen extent -55,-50 55,40
SPEC-KS-001 [mm]
  rect 2.5x2.5 smd far side: 1(-6,-5.08) 2(7.15,-2.54)
  round 3 hole 3: 3(-2.54,-5.08) 4(3.8,-2.54)
  round 4 hole 4: 5(0,0)
  round 1.7 hole 1.7: 6(-5.08,0) 7(5.08,0)
  round 0 all layers, no hole: 8(0,0) 9(0,0)
  round 0.5 hole 0.3 mask+0.102: 10(-4.6,-4.1) 11(-4.6,-5) 12(5.8,-1.6) 13(5.8,-2.6) 14(-4.6,-6.1) 15(-7.4,-4.1) 16(-7.4,-5.1) 17(-7.4,-6.1) 18(5.8,-3.5) 19(8.5,-1.6) 20(8.5,-2.5) 21(8.5,-3.5)
  silkscreen extent -7,-7 7,7
TSET1.0 [mm]
  round 1.2 smd: 1(0,0)
  silkscreen extent -0.53,-0.53 0.53,0.53
TSET1.0CA [mm]
  round 3 hole 2.15: 1(0,0)
  silkscreen extent -0.53,-0.53 0.53,0.53
TSET1.0GA [mm]
  round 1.4 hole 0.9: 1(0,0)
  silkscreen extent -0.75,-0.76 0.75,0.75
"USB TYPC-C/F 16PIN" [mm]
  oval 1x1.6 hole 1 slot 1.6 at 90 deg: 0(-4.327,-4.728) 0(4.333,-4.728)
  oval 1x2.1 hole 1 slot 2.1 at 90 deg: 0(-4.322,-0.54) 0(4.328,-0.54)
  rect 0.6x1.55 smd far side: A1(3.198,0.21) A4(2.398,0.21) B1(-3.202,0.21) B4(-2.402,0.21)
  rect 0.3x1.55 smd far side: A5(1.248,0.21) A6(0.248,0.21) A7(-0.252,0.21) B5(-1.752,0.21) B6(-0.752,0.21) B7(0.748,0.21)
  rect 0.3x1.55 on Bottom Overlay: A8(-1.252,0.21) B8(1.748,0.21)
  oval 0.6x1.2 on Keep-Out: ""(-4.327,-4.728) ""(4.333,-4.728)
  oval 0.6x1.7 on Keep-Out: ""(-4.322,-0.54) ""(4.328,-0.54)
  Keep-Out Layer circle w0.127: c2.888,-1.048 r0.325
  Keep-Out Layer circle w0.127: c-2.892,-1.048 r0.325
  Keep-Out Layer lines w0.127: 4.628,0.002 ccw(c4.328,0.002) 4.328,0.302 ccw(c4.328,0.002) 4.028,0.002 4.028,-1.098 ccw(c4.328,-1.098) 4.328,-1.398 ccw(c4.328,-1.098) 4.628,-1.098 4.628,0.002 ; 4.628,-4.428 ccw(c4.328,-4.428) 4.328,-4.128 ccw(c4.328,-4.428) 4.028,-4.428 4.028,-5.028 ccw(c4.328,-5.028) 4.328,-5.328 ccw(c4.328,-5.028) 4.628,-5.028 4.628,-4.428 ; -4.022,0.002 ccw(c-4.322,0.002) -4.322,0.302 ccw(c-4.322,0.002) -4.622,0.002 -4.622,-1.098 ccw(c-4.322,-1.098) -4.322,-1.398 ccw(c-4.322,-1.098) -4.022,-1.098 -4.022,0.002 ; -4.022,-4.428 ccw(c-4.322,-4.428) -4.322,-4.128 ccw(c-4.322,-4.428) -4.622,-4.428 -4.622,-5.028 ccw(c-4.322,-5.028) -4.322,-5.328 ccw(c-4.322,-5.028) -4.022,-5.028 -4.022,-4.428
XTAL-3225 [mm]
  rect 1.3x1.1 smd: 1(-1.15,-0.95) 2(1.15,-0.95) 3(1.15,0.95) 4(-1.15,0.95)
  silkscreen extent -1.6,-2.1 1.6,1.3
编码器 [mm]
  round 1.4 hole 0.8: 1(0.027,0.039) 2(2.527,0.039) 3(5.027,0.039) 4(0.027,-3.311) 5(2.527,-3.311) 6(5.027,-3.311)

## Via types
v1: diameter 0.508, hole 0.305, Top to Bottom, tented both sides, 758 vias

## Nets (pads, with @x,y where several pads share a name; then routed paths per layer and width w, separated by ;. In a path a pad name is that pad's centre, name@x,y a point inside that pad or via, vN(x,y) a via of type N, cw(c..) or ccw(c..) an arc to the next point about the centre after c; other vN are vias at no path point)
2.4G: D10.2 D11.2 PC1.3 PC1.6 | length 57.2
  Top w0.2: PC1.3@245.001,40.113 PC1.6@245.001,43.463 ; v1(256.54,44.329) 256.54,55.88 258.696,58.036 v1(258.696,81.237)
  Bottom w0.2: PC1.6@244.716,43.345 247.561,43.345 248.575,44.359 256.51,44.359 v1(256.54,44.329) ; v1(258.696,81.237) 259.77,81.237 D10.2@259.813,81.28 262.306,81.28 D11.2@262.402,81.376
2.4G_MODE: D10.1 U8.45 | length 243.6
  Top w0.2: v1(106.28,81.659) 106.282,81.657 106.282,66.021 105.96,65.7 105.96,53.552 106.755,52.757 106.755,43.251 109.587,40.419 109.587,36.082 112.153,33.516 112.153,21.689 110.525,20.061 v1(110.525,20.004) ; v1(214.093,88.136) 214.034,88.077 214.034,87.897 214.001,87.865 214.001,82.73 214.589,82.142 214.585,82.138 214.585,81.711 v1(214.526,81.652) ; v1(232.71,78.389) 232.71,85.797 232.752,85.839 232.752,86.009 v1(232.811,86.068) ; v1(257.558,77.467) 257.634,77.543 257.634,81.201 v1(257.588,81.247)
  Bottom w0.2: v1(106.28,81.659) 106.283,81.661 146.937,81.661 149.369,84.093 154.338,84.093 156.803,81.628 214.502,81.628 v1(214.526,81.652) ; v1(110.525,20.004) 110.525,20.546 110.943,20.965 112.126,20.965 112.627,20.464 U8.45@112.627,19.679 ; v1(214.093,88.136) 214.656,88.136 215.392,87.4 223.316,87.4 224.808,85.908 232.687,85.908 232.811,86.033 v1(232.811,86.068) ; v1(232.71,78.389) 245.969,78.389 246.744,77.614 257.441,77.614 257.558,77.497 v1(257.558,77.467) ; D10.1@256.413,81.28 256.446,81.247 v1(257.588,81.247)
$$$59: DV1.1 L1.2 U4.1 | length 10.3
  Top w0.2: v1(287.02,62.23) v1(287.02,64.77)
  Bottom w0.2: U4.1@284.414,66.207 284.518,66.103 L1.2@287.667,66.103 ; DV1.1@284.607,61.976 284.861,62.23 v1(287.02,62.23) ; v1(287.02,64.77) 287.02,65.456 L1.2@287.667,66.103 ; L1.2@288.036,66.103 L1.2@287.667,66.103
$$$474: R21.1 U5.7 | length 7.4
  Bottom w0.2: R21.1@246.618,82.728 246.618,82.566 248.412,80.772 251.587,80.772 251.841,81.026 U5.7@251.841,82.22
$$$2460: Q23.3 R103.2 | length 2.7
  Bottom w0.2: Q23.3@276.769,45.804 279.238,45.804 R103.2@279.4,45.966
$$$2478: C31.2 U8.32 | length 11.9
  Bottom w0.2: C31.2@101.232,9.329 102.42,9.329 103.528,10.437 104.524,10.437 105.414,11.326 106.047,11.326 109.45,14.729 U8.32@110.877,14.729
$$$8367: C1.2 U8.29 Y4.1 | length 8.9
  Bottom w0.2: Y4.1@107.988,8.869 107.495,9.362 107.495,11.465 109.004,12.975 110.76,12.975 110.877,13.092 U8.29@110.877,13.529 ; Y4.1@108.475,8.482 108.807,8.15 109.825,8.15 C1.2@109.903,8.227
$$$10735: R2.2 R3.2 U8.20 | length 5.1
  Bottom w0.2: U8.20@115.027,12.579 115.027,12.179 115.027,11.916 116.677,10.266 R3.2@116.677,9.213 ; R3.2@116.713,9.213 117.795,9.213 R2.2@117.8,9.218
$$$12993: C7.2 U8.30 Y4.3 | length 8.5
  Bottom w0.2: C7.2@104.572,9.687 104.776,9.891 105.585,9.891 106.075,10.382 Y4.3@106.175,10.382 ; Y4.3@106.309,10.329 106.66,10.679 107.008,10.679 107.095,10.766 107.095,11.631 108.86,13.396 109.802,13.396 110.077,13.671 110.077,13.695 110.311,13.929 U8.30@110.877,13.929
$$$13100: R91.1 U5.2 | length 4.9
  Bottom w0.2: R91.1@248.643,88.047 248.668,88.047 249.033,88.412 249.033,89.053 249.18,89.2 251.236,89.2 251.841,88.595 U5.2@251.841,87.96
$$$16148: R10.1 U1.23 | length 3.7
  Bottom w0.2: R10.1@230.632,32.631 232.672,32.631 233.168,32.135 U1.23@233.168,31.19
$$$17616: D1.1 SW18.1 SW18.10 SW18.11 SW18.14 SW18.15 SW18.16 SW18.17 | length 20.1
  Top w0.2: v1(34.505,80.857) v1(34.505,84.193)
  Bottom w0.2: SW18.1@22.732,84.654 22.732,85.978 23.208,86.454 27.846,86.454 30.107,84.193 v1(34.505,84.193) ; v1(34.505,80.857) 36.364,80.857 D1.1@36.83,80.391
$$$17724: D6.1 SW50.1 SW50.10 SW50.11 SW50.14 SW50.15 SW50.16 SW50.17 | length 2.9
  Bottom w0.2: SW50.1@253.232,75.814 D6.1@256.171,75.814
$$$19631: L2.4 R115.2 USB1.A7 USB1.B7 | length 33.2
  Top w0.2: v1(16.909,82.833) 16.967,82.892 16.967,83.054 17.018,83.105 17.018,84.665 17.201,84.848 17.201,89.14 19.263,91.203 19.263,92.935 18.956,93.242 v1(18.926,93.242) ; 23.185,80.141 23.185,76.51 26.373,73.322 26.373,72.477 26.026,72.131 v1(26.026,72.124)
  Bottom w0.2: v1(16.909,82.833) 16.909,82.751 17.098,82.562 17.098,81.911 17.602,81.407 22.725,81.407 23.185,80.947 23.185,80.645 23.016,80.476 v1(23.016,80.393) ; USB1.B7@18.571,92.007 18.571,92.915 v1@18.738,93.082 ; v1(18.926,93.242) 18.898,93.242 v1@18.738,93.082 ; USB1.A7@19.521,92.057 19.521,92.965 19.403,93.082 18.926,93.082 v1@18.738,93.082 ; v1(26.026,72.124) 26.026,71.23 L2.4@26.047,71.209
  other v1: 17.018,84.582
$$$19635: L2.1 R116.2 USB1.A6 USB1.B6 | length 34.4
  Top w0.2: v1(17.687,82.828) 17.687,84.373 17.793,84.479 v1(17.793,84.563) ; v1@17.835,84.604 17.601,84.839 17.601,88.975 19.663,91.037 19.663,92.905 v1(20,93.242) ; 23.585,80.146 23.585,76.676 26.773,73.488 26.773,72.477 27.113,72.138 v1(27.119,72.138)
  Bottom w0.2: v1(17.687,82.828) 17.687,82.746 17.498,82.557 17.498,82.077 17.768,81.807 22.891,81.807 23.585,81.113 23.585,80.651 23.754,80.482 v1(23.754,80.398) ; USB1.A6@19.071,92.007 19.071,90.949 19.188,90.832 19.782,90.832 20.021,91.071 20.021,91.957 20.021,93.222 v1(20,93.242) ; v1(27.119,72.138) 27.119,71.337 L2.1@27.247,71.209
$$$21351: R70.1 U7.23 | length 2.9
  Bottom w0.2: R70.1@258.58,30.734 259.467,30.734 259.584,30.851 U7.23@259.584,32.714
$$$21391: C18.2 C26.1 C27.2 | length 2.2
  Bottom w0.2: C18.2@95.947,10.152 95.955,10.161 C26.1@98.166,10.161
$$$22003: QP20.1 R14.2 R103.1 | length 6.4
  Top w0.2: v1(281.924,47.736) 281.94,47.752 v1(281.94,50.536)
  Bottom w0.2: R103.1@279.4,47.506 280.887,47.506 QP20.1@281.117,47.736 v1(281.924,47.736) v1@281.94,47.752 ; R14.2@281.854,49.63 281.94,49.716 v1(281.94,50.536)
$$$22043: Q23.1 R33.2 | length 1.7
  Bottom w0.2: R33.2@274.193,47.633 274.396,47.836 Q23.1@275.816,47.836
$$$24202: U9.10 U12.2 | length 12.5
  Top w0.2: v1(166.407,17.767) 166.475,17.835 v1(166.475,20.504)
  Bottom w0.2: U9.10@162.687,16.256 162.687,17.018 163.436,17.767 v1(166.407,17.767) ; v1(166.475,20.504) 169.856,20.504 170.097,20.745 170.097,21.873 U12.2@170.18,21.956
$$$24964: DV3.1 QP20.3 | length 4.2
  Bottom w0.2: QP20.3@282.067,45.736 282.467,46.136 283.11,46.136 283.964,46.99 DV3.1@285.75,46.99
$$$25347: R9.2 R11.1 U5.1 VBAT1.2 | length 32.1
  Bottom w0.2: R11.1@244.827,86.507 R9.2@246.75,86.507 246.775,86.507 247.14,86.872 247.14,87.12 247.302,87.282 249.257,87.282 249.936,87.96 U5.1@250.571,87.96 250.571,87.232 251.112,86.691 255.193,86.691 256.159,85.725 261.911,85.725 263.2,87.014 271.507,87.014 272.665,87.014 273.321,86.358 VBAT1.2@274.033,86.358
$$$25355: R80.1 U4.6 | length 2.6
  Bottom w0.2: U4.6@284.414,68.707 284.414,70.538 R80.1@284.988,71.112
$$$26007: C21.2 DD5.2 R5.2 USB1.0 | length 72.1
  Top w0.2: USB1.0@14.894,92.602 8.02,92.602 7.38,91.962 7.38,88.164 15.113,80.431 15.113,74.924 18.034,72.003 v1(18.034,68.453) ; USB1.0@14.986,96.945 23.646,96.945 23.641,96.94 USB1.0@23.641,92.757 ; USB1.0@14.991,92.757 USB1.0@14.991,96.376
  Bottom w0.2: R5.2@5.169,66.346 5.128,66.305 C21.2@3.321,66.305 3.321,68.726 DD5.2@4.064,69.469 5.099,68.434 18.015,68.434 v1(18.034,68.453) ; USB1.0@23.626,92.533 23.641,92.547 USB1.0@23.641,92.757
$$$26008: DD5.1 P02.1 | length 5.9
  Bottom w0.2: DD5.1@4.064,74.041 4.064,79.323 P02.1@4.536,79.795
$$$26921: R31.2 U5.8 | length 2.4
  Bottom w0.2: R31.2@248.532,82.727 250.382,82.727 250.571,82.538 U5.8@250.571,82.22
$$$28270: D76.1 SW14.1 SW14.10 SW14.11 SW14.14 SW14.15 SW14.16 SW14.17 | length 2.8
  Bottom w0.2: SW14.1@205.82,18.814 208.604,18.814 D76.1@208.606,18.816
$$$28630: D2.1 SW92.1 SW92.10 SW92.11 SW92.14 SW92.15 SW92.16 SW92.17 | length 2.8
  Bottom w0.2: SW92.1@18.113,18.815 D2.1@20.884,18.815
$$$28632: D3.1 SW75.1 SW75.10 SW75.11 SW75.14 SW75.15 SW75.16 SW75.17 | length 3
  Bottom w0.2: SW75.1@27.612,37.814 D3.1@30.621,37.815
$$$28765: D16.1 SW93.1 SW93.10 SW93.11 SW93.14 SW93.15 SW93.16 SW93.17 | length 4.4
  Bottom w0.2: SW93.1@41.857,18.814 41.857,17.325 43.336,15.846 D16.1@44.196,15.846
$$$28767: D15.1 SW76.1 SW76.10 SW76.11 SW76.14 SW76.15 SW76.16 SW76.17 | length 2.8
  Bottom w0.2: SW76.1@58.487,37.814 SW76.1@58.487,37.814 D15.1@61.292,37.816
$$$28777: D14.1 SW60.1 SW60.10 SW60.11 SW60.14 SW60.15 SW60.16 SW60.17 | length 4.9
  Bottom w0.2: SW60.1@48.987,56.814 48.987,55.042 49.112,54.916 51.161,54.916 D14.1@51.778,54.3
$$$28779: D13.1 SW39.1 SW39.10 SW39.11 SW39.14 SW39.15 SW39.16 SW39.17 | length 2.8
  Bottom w0.2: SW39.1@44.232,75.814 47.058,75.814 D13.1@47.061,75.817
$$$28783: 
$$$28785: D5.1 SW17.1 SW17.10 SW17.11 SW17.14 SW17.15 SW17.16 SW17.17 | length 7.1
  Bottom w0.2: SW17.1@3.732,84.654 7.741,80.645 D5.1@9.144,80.645
$$$28787: D7.1 SW38.1 SW38.10 SW38.11 SW38.14 SW38.15 SW38.16 SW38.17 | length 3
  Bottom w0.2: SW38.1@20.482,75.814 23.5,75.814 D7.1@23.504,75.81
$$$28789: D12.1 SW59.1 SW59.10 SW59.11 SW59.14 SW59.15 SW59.16 SW59.17 | length 2.9
  Bottom w0.2: SW59.1@22.862,56.814 SW59.1@22.862,56.814 D12.1@25.793,56.815
$$$28853: 
$$$28855: D19.1 SW19.1 SW19.10 SW19.11 SW19.14 SW19.15 SW19.16 SW19.17 | length 2.8
  Bottom w0.2: SW19.1@53.732,94.814 D19.1@56.492,94.814
$$$28858: D18.1 SW40.1 SW40.10 SW40.11 SW40.14 SW40.15 SW40.16 SW40.17 | length 3
  Bottom w0.2: SW40.1@63.232,75.814 66.18,75.814 D18.1@66.182,75.816
$$$28860: D17.1 SW61.1 SW61.10 SW61.11 SW61.14 SW61.15 SW61.16 SW61.17 | length 3.4
  Bottom w0.2: SW61.1@67.987,56.814 69.036,55.765 D17.1@70.918,55.765
$$$28916: D22.1 SW94.1 SW94.10 SW94.11 SW94.14 SW94.15 SW94.16 SW94.17 | length 26.1
  Top w0.2: SW94.14@64.202,19.834 v1(64.202,30.302)
  Bottom w0.2: v1@64.239,30.265 78.681,30.265 D22.1@79.531,31.115
$$$28917: D21.1 SW77.1 SW77.10 SW77.11 SW77.14 SW77.15 SW77.16 SW77.17 | length 4.2
  Bottom w0.2: SW77.1@77.487,37.814 D21.1@80.286,37.814 ; SW77.16@78.887,37.814 D21.1@80.286,37.814 ; D21.1@80.287,37.813 D21.1@80.286,37.814
$$$28920: D23.1 SW62.1 SW62.10 SW62.11 SW62.14 SW62.15 SW62.16 SW62.17 | length 2.7
  Bottom w0.2: SW62.1@86.987,56.814 86.99,56.817 D23.1@89.692,56.817
$$$28921: D24.1 SW41.1 SW41.10 SW41.11 SW41.14 SW41.15 SW41.16 SW41.17 | length 3.3
  Bottom w0.2: SW41.1@82.232,75.814 83.35,74.696 D24.1@85.068,74.696
$$$28958: D25.1 SW20.1 SW20.10 SW20.11 SW20.14 SW20.15 SW20.16 SW20.17 | length 8.4
  Top w0.2: v1(73.105,93.014) 73.164,92.955 73.164,92.754 73.176,92.742 v1(73.176,88.083)
  Bottom w0.2: SW20.1@72.732,94.814 73.105,94.441 v1(73.105,93.014) ; v1(73.176,88.083) 73.176,87.012 D25.1@73.463,86.725
$$$28959: 
$$$29003: D27.1 SW78.1 SW78.10 SW78.11 SW78.14 SW78.15 SW78.16 SW78.17 | length 2.8
  Bottom w0.2: SW78.1@96.487,37.814 96.49,37.812 D27.1@99.256,37.812
$$$29033: D28.1 SW63.1 SW63.10 SW63.11 SW63.14 SW63.15 SW63.16 SW63.17 | length 7.5
  Top w0.2: v1(107.107,54.603) 107.048,54.544 107.048,54.378 107.043,54.373 107.88,53.536 v1(107.88,51.74)
  Bottom w0.2: SW63.1@105.987,56.814 106.945,55.856 106.945,54.848 107.107,54.686 v1(107.107,54.603) ; D28.1@107.442,50.292 107.88,50.73 v1(107.88,51.74)
$$$29035: D29.1 SW42.1 SW42.10 SW42.11 SW42.14 SW42.15 SW42.16 SW42.17 | length 2.8
  Bottom w0.2: SW42.1@101.232,75.814 101.233,75.813 102.632,75.813 D29.1@104.014,75.813
$$$29037: D30.1 SW21.1 SW21.10 SW21.11 SW21.14 SW21.15 SW21.16 SW21.17 | length 3.3
  Bottom w0.2: SW21.1@91.732,94.814 91.931,94.615 94.712,94.615 D30.1@94.513,94.814
$$$29040: 
$$$29070: D32.1 SW79.1 SW79.10 SW79.11 SW79.14 SW79.15 SW79.16 SW79.17 | length 5.6
  Bottom w0.2: SW79.1@115.487,37.814 115.491,37.818 D32.1@118.299,37.818 ; D32.1@118.299,37.818 116.887,37.818 D32.1@118.299,37.818
$$$29094: D33.1 SW64.1 SW64.10 SW64.11 SW64.14 SW64.15 SW64.16 SW64.17 | length 2.8
  Bottom w0.2: SW64.1@124.987,56.814 124.989,56.817 D33.1@127.755,56.817
$$$29097: D34.1 SW43.1 SW43.10 SW43.11 SW43.14 SW43.15 SW43.16 SW43.17 | length 3.3
  Bottom w0.2: SW43.1@119.927,75.633 120.108,75.814 SW43.1@120.232,75.814 123.1,75.814 D34.1@123.118,75.796
$$$29099: D35.1 SW22.1 SW22.10 SW22.11 SW22.14 SW22.15 SW22.16 SW22.17 | length 2.7
  Bottom w0.2: SW22.1@110.732,94.814 113.431,94.814 D35.1@113.434,94.817
$$$29102: 
$$$29224: D40.1 SW44.1 SW44.10 SW44.11 SW44.14 SW44.15 SW44.16 SW44.17 | length 2.8
  Bottom w0.2: SW44.1@139.232,75.814 142.015,75.814 D40.1@142.017,75.817
$$$29248: 
$$$29251: D41.1 SW23.1 SW23.10 SW23.11 SW23.14 SW23.15 SW23.16 SW23.17 | length 3.2
  Bottom w0.2: SW23.1@129.732,94.814 SW23.1@129.841,94.814 ; SW23.1@130.137,95.11 SW23.1@129.841,94.814 ; D41.1@132.514,94.812 132.512,94.814 SW23.1@129.841,94.814
$$$29271: D43.1 SW45.1 SW45.10 SW45.11 SW45.14 SW45.15 SW45.16 SW45.17 | length 2.8
  Bottom w0.2: SW45.1@158.232,75.814 D43.1@160.999,75.814
$$$29289: D44.1 SW24.1 SW24.10 SW24.11 SW24.14 SW24.15 SW24.16 SW24.17 | length 8.4
  Top w0.2: v1(149.35,92.923) 149.352,92.922 v1(149.352,88.265)
  Bottom w0.2: SW24.1@148.732,94.814 149.35,94.196 v1(149.35,92.923) ; v1(149.352,88.265) 149.352,87.249 D44.1@149.733,86.868
$$$29296: 
$$$29318: D47.1 SW66.1 SW66.10 SW66.11 SW66.14 SW66.15 SW66.16 SW66.17 | length 2.8
  Bottom w0.2: SW66.1@162.987,56.814 D47.1@165.836,56.815
$$$29321: D46.1 SW81.1 SW81.10 SW81.11 SW81.14 SW81.15 SW81.16 SW81.17 | length 4.2
  Bottom w0.2: SW81.16@154.887,37.814 SW81.1@153.487,37.814 153.488,37.816 154.887,37.816 156.263,37.816 D46.1@156.264,37.817
$$$29330: D39.1 SW65.1 SW65.10 SW65.11 SW65.14 SW65.15 SW65.16 SW65.17 | length 2.9
  Bottom w0.2: SW65.1@143.987,56.814 146.914,56.814 D39.1@146.916,56.812
$$$29332: D38.1 SW80.1 SW80.10 SW80.11 SW80.14 SW80.15 SW80.16 SW80.17 | length 2.7
  Bottom w0.2: SW80.1@134.487,37.814 134.489,37.816 D38.1@137.219,37.816
$$$29335: D37.1 SW95.1 SW95.10 SW95.11 SW95.14 SW95.15 SW95.16 SW95.17 | length 3.5
  Bottom w0.2: SW95.1@136.857,18.856 137.454,18.259 D37.1@140.081,18.259
$$$29365: D50.1 SW67.1 SW67.10 SW67.11 SW67.14 SW67.15 SW67.16 SW67.17 | length 7.7
  Top w0.2: v1(182.504,50.841) 182.504,54.915 v1(182.535,54.945)
  Bottom w0.2: SW67.1@181.987,56.814 182.625,56.177 182.535,56.087 v1(182.535,54.945) ; v1(182.504,50.841) D50.1@183.958,50.841
$$$29367: D48.1 SW46.1 SW46.10 SW46.11 SW46.14 SW46.15 SW46.16 SW46.17 | length 2.8
  Bottom w0.2: SW46.1@177.232,75.814 180.055,75.814 D48.1@180.057,75.816
$$$29372: D49.1 SW82.1 SW82.10 SW82.11 SW82.14 SW82.15 SW82.16 SW82.17 | length 2.8
  Bottom w0.2: SW82.1@172.487,37.814 D49.1@175.272,37.815
$$$29405: 
$$$29407: D51.1 SW25.1 SW25.10 SW25.11 SW25.14 SW25.15 SW25.16 SW25.17 | length 2.6
  Bottom w0.2: SW25.1@167.732,94.814 D51.1@170.353,94.816 D51.1@170.353,94.816
$$$29424: D53.1 SW47.1 SW47.10 SW47.11 SW47.14 SW47.15 SW47.16 SW47.17 | length 2.8
  Bottom w0.2: SW47.1@196.232,75.814 199.032,75.814 D53.1@199.033,75.813
$$$29426: D55.1 SW68.1 SW68.10 SW68.11 SW68.14 SW68.15 SW68.16 SW68.17 | length 2.7
  Bottom w0.2: SW68.1@200.987,56.814 200.989,56.817 D55.1@203.734,56.817
$$$29429: D54.1 SW83.1 SW83.10 SW83.11 SW83.14 SW83.15 SW83.16 SW83.17 | length 2.7
  Bottom w0.2: SW83.1@191.487,37.814 D54.1@194.206,37.815
$$$29453: 
$$$29456: D56.1 SW26.1 SW26.10 SW26.11 SW26.14 SW26.15 SW26.16 SW26.17 | length 2.8
  Bottom w0.2: SW26.1@186.732,94.814 D56.1@189.51,94.815
$$$29474: D59.1 SW97.1 SW97.10 SW97.11 SW97.14 SW97.15 SW97.16 SW97.17 | length 3.4
  Bottom w0.2: SW97.1@224.907,18.814 226.105,20.012 D59.1@227.819,20.012
$$$29476: D60.1 SW84.1 SW84.10 SW84.11 SW84.14 SW84.15 SW84.16 SW84.17 | length 2.8
  Bottom w0.2: SW84.1@210.487,37.814 210.491,37.81 SW84.16@211.887,37.81 ; SW84.16@211.887,37.834 211.901,37.82 213.222,37.82 D60.1@213.231,37.81
$$$29479: D58.1 SW69.1 SW69.10 SW69.11 SW69.14 SW69.15 SW69.16 SW69.17 | length 2.9
  Bottom w0.2: SW69.1@219.987,56.814 222.865,56.814 D58.1@222.869,56.81
$$$29481: D61.1 SW48.1 SW48.10 SW48.11 SW48.14 SW48.15 SW48.16 SW48.17 | length 3.4
  Bottom w0.2: SW48.1@215.232,75.814 216.212,74.834 216.557,74.834 216.632,74.76 216.649,74.777 216.882,74.777 216.899,74.76 217.669,74.76 D61.1@218.027,74.401
$$$29520: 